# Altium PCB GY-G11.PCBDOC (part 1 of 7)
Units mm, origin at the board's own origin, x right, y up, seen from the top; angles counter-clockwise.
Board outline 170.4 x 114.15 mm, 2 copper layers (Top Layer, Bottom Layer); 364 components, 260 nets, 1285 pads, 753 vias.
Unrouted connection lines stored in the file: 2.
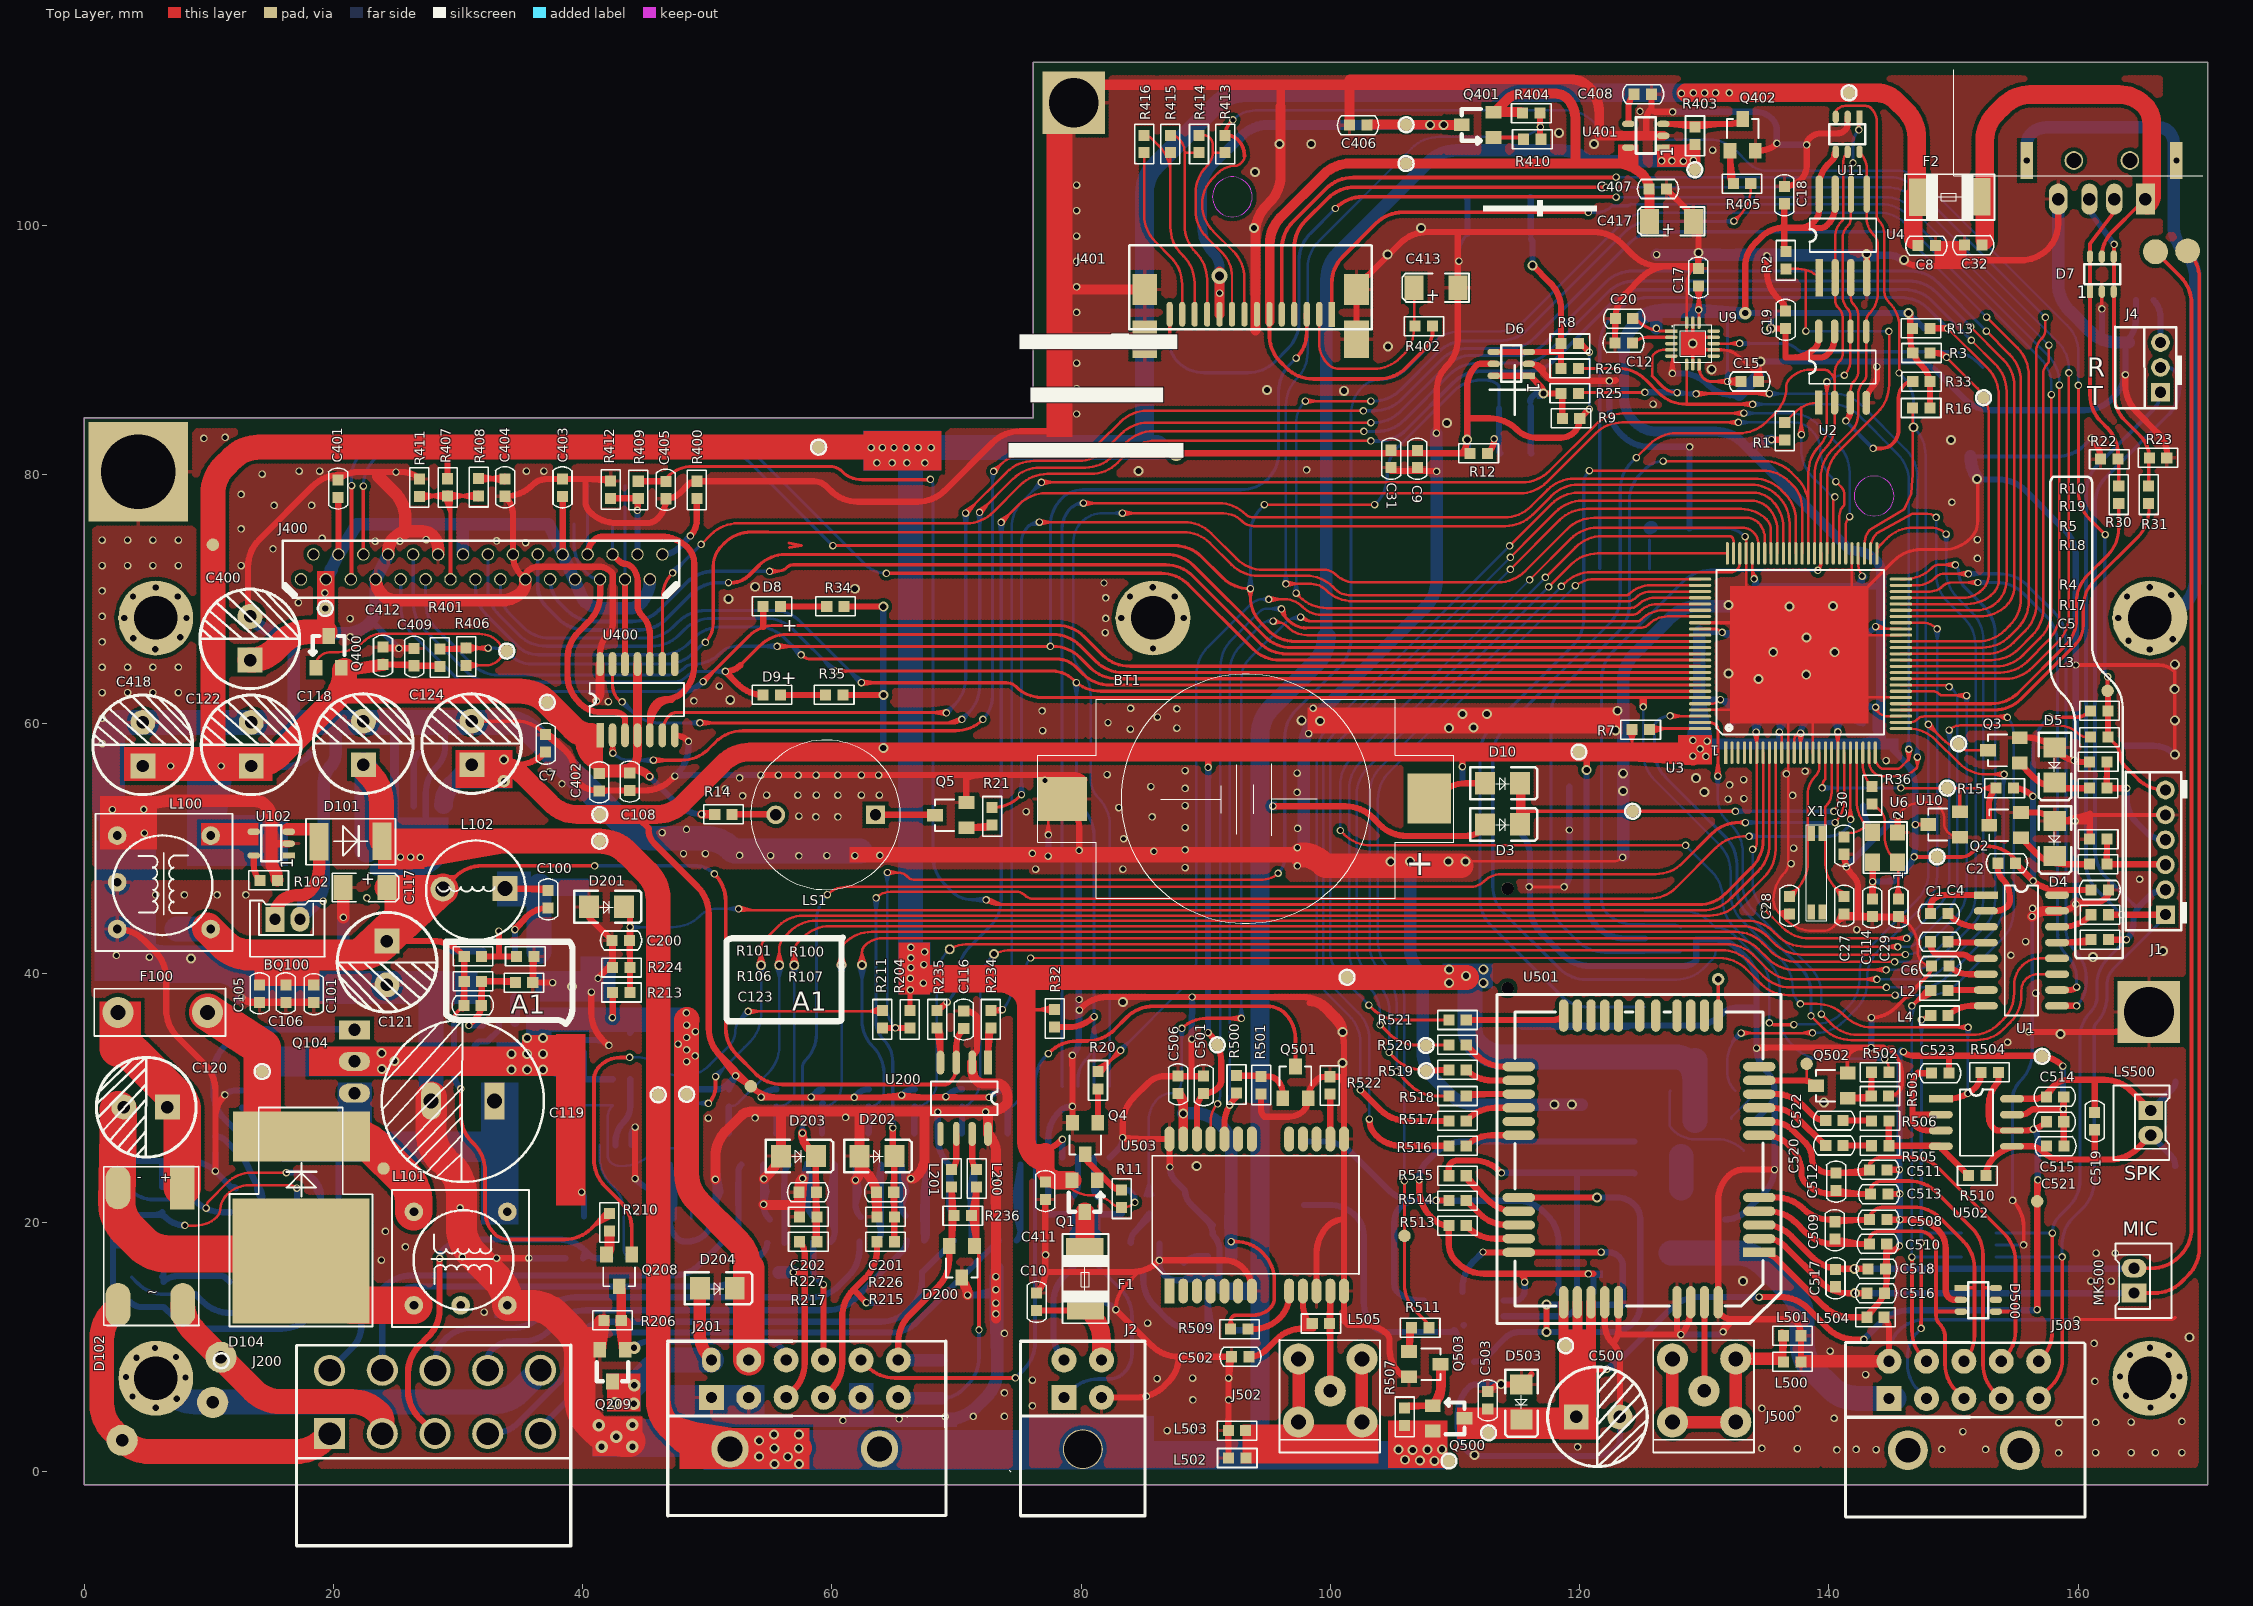
[diagram p0: Top Layer view]
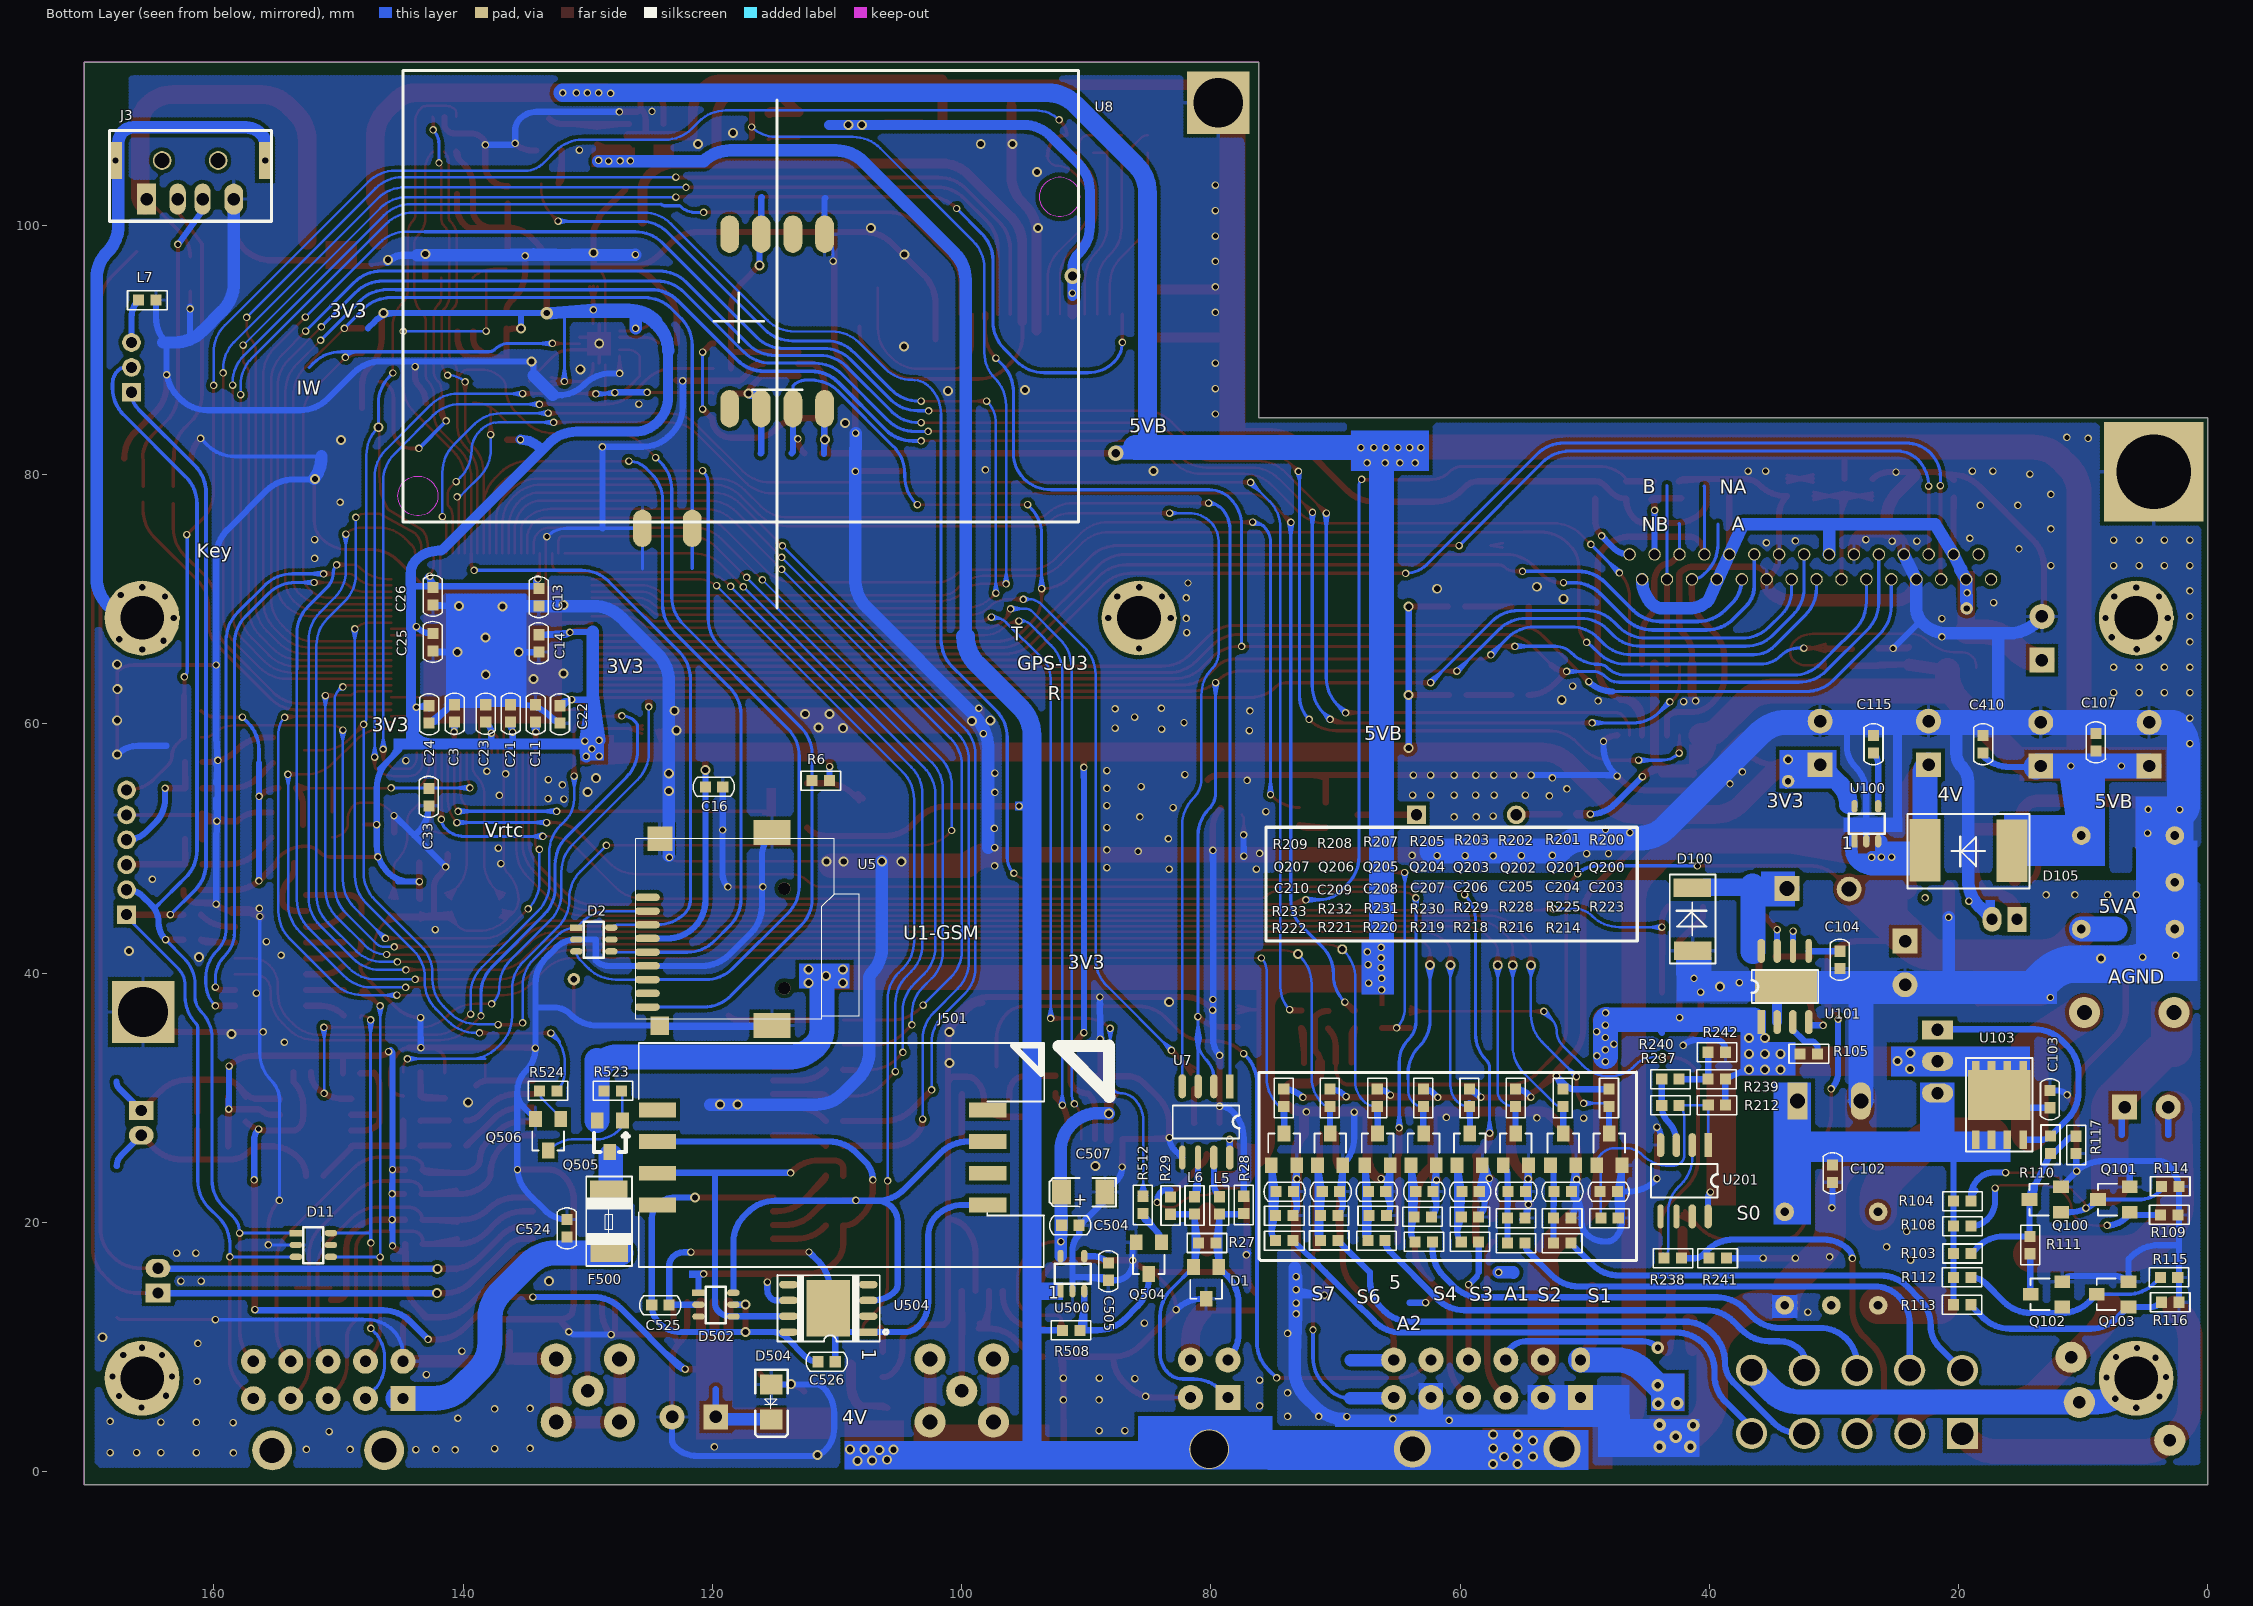
[diagram p1: Bottom Layer view, seen from below]

## Layer stack, top to bottom
Top Layer: signal copper 0.0356
Dielectric: core 0.32, FR-4, Dk 4.8
Bottom Layer: signal copper 0.0356

## Board outline
0,-1.05 170.4,-1.05 170.4,113.1 76.15,113.1 76.15,84.55 0,84.55

## Design rules (kind name [scope] priority, off if disabled: settings)
Clearance [All] p1: gap=0.2
FabricationTestPointUsage TestPointUsage [All] p1: valid=0 allowmultiple=FALSE
FabricationTestpoint Testpoint [All] p1: side=3 testpointundercomponent=TRUE minsize=1.016 maxsize=2.54 preferedsize=1.524 minholesize=0 maxholesize=1.016 preferedholesize=0.813 testpointgrid=0.025 allowsidetop=TRUE allowsidebottom=TRUE usegrid=TRUE gridtolerance=0
PolygonConnect [All] p1: connectstyle=Relief reliefconductorwidth=0.254 reliefentries=4 polygonreliefangle="90 Angle"
RoutingVias [All] p1: holewidth=0.4 width=0.6 viastyle="Through Hole" minholewidth=0.4 minwidth=0.6 maxholewidth=5 maxwidth=3
SilkscreenOverComponentPads [All] p1: minsilkscreentomaskgap=0.254
SolderMaskExpansion [All] p1: expansion=0.102
Width [All] p1: maxlimit=5 minlimit=0.2 preferedwidth=0.5 bottomlayer_prefwidth=0.254 minimp=50.000000 maximp=50.000000 favimp=50.000000
25 further rules are at their usual default settings.

## Classes and differential pairs
component class U_G11_PowerSelfLock: BQ100 C100 C101 C102 C103 C104 C105 C106 C107 C108 C114 C115 C116 C117 C118 C119 C120 C121 C122 C123 C124 D100 D101 D102 D104 D105 F100 L100 L101 L102 Q100 Q101 Q102 Q103 Q104 R100 R101 R102 R103 R104 R105 R106 R107 R108 R109 R110 R111 R112 R113 R114 R115 R116 R117 U100 U101 U102 U103
component class U_G11_Main: BT1 C1 C2 C3 C4 C5 C6 C7 C8 C9 C10 C11 C12 C13 C14 C15 C16 C17 C18 C19 C20 C21 C22 C23 C24 C25 C26 C27 C28 C29 C30 C31 C32 C33 D1 D2 D3 D4 D5 D6 D7 D8 D9 D10 D11 F1 F2 J1 J2 J3 J4 L1 L2 L3 L4 L5 L6 L7 Logo1 LS1 Q1 Q2 Q3 Q4 Q5 R1 R2 R3 R4 R5 R6 R7 R8 R9 R10 R11 R12 R13 R14 R15 R16 R17 R18 R19 R20 R21 R22 R23 R25 R26 R27 R28 R29 R30 R31 R32 R33 R34 R35 R36 U1 U2 U3 U4 U5 U6 U7 U8 U9 U10 U11 X1
component class U_G11_IO_ADC: C200 C201 C202 C203 C204 C205 C206 C207 C208 C209 C210 D200 D201 D202 D203 D204 F200 J200 J201 L200 L201 Q200 Q201 Q202 Q203 Q204 Q205 Q206 Q207 Q208 Q209 R200 R201 R202 R203 R204 R205 R206 R207 R208 R209 R210 R211 R212 R213 R214 R215 R216 R217 R218 R219 R220 R221 R222 R223 R224 R225 R226 R227 R228 R229 R230 R231 R232 R233 R234 R235 R236 R237 R238 R239 R240 R241 R242 U200 U201
component class U_G11_GPS-GSM: C500 C501 C502 C503 C504 C505 C506 C507 C508 C509 C510 C511 C512 C513 C514 C515 C516 C517 C518 C519 C520 C521 C522 C523 C524 C525 C526 D500 D502 D503 D504 F500 J500 J501 J502 J503 L500 L501 L502 L503 L504 L505 LS500 MK500 Q500 Q501 Q502 Q503 Q504 Q505 Q506 R500 R501 R502 R503 R504 R505 R506 R507 R508 R509 R510 R511 R512 R513 R514 R515 R516 R517 R518 R519 R520 R521 R522 R523 R524 U500 U501 U502 U503 U504
component class G11-KeyDispPrint: C400 C401 C402 C403 C404 C405 C406 C407 C408 C409 C410 C411 C412 C413 C417 C418 J400 J401 J402 J403 Q400 Q401 Q402 R400 R401 R402 R403 R404 R405 R406 R407 R408 R409 R410 R411 R412 R413 R414 R415 R416 U400 U401

## Components (designator, comment, footprint, x,y, rotation, side; value= is the part's Value field where it differs from the comment)
BQ100 "3V6" BT-2.0#1 15.3,44.3 r180 top locked
BT1 "3V6" BAT3V-33*20 93.2,54 r180 top locked
C1 "104" C0603#1 148.1,44.8 r0 top locked
C2 "104" C0603#1 155,48.8 r180 top locked
C3 "104" C0603#1 140.7,60.1 r90 bottom locked
C4 "104" C0603#1 149.6,42.5 r180 top locked
C5 "104" C0603#1 161,46.7 r0 top locked
C6 "104" C0603#1 148.2,40.6 r0 top locked
C7 "104" C0603#1 37,57.7 r90 top locked
C8 "104" C0603#1 147.1,98.4 r0 top locked
C9 "104" C0603#1 107,82 r270 top locked
C10 "104" C0603#1 76.4,12.9 r90 top locked
C11 "104" C0603#1 134.2,60.1 r90 bottom locked
C12 "104" C0603#1 122.8,90.6 r0 top locked
C13 "104" C0603#1 133.9,70.9 r270 bottom locked
C14 "104" C0603#1 133.9,67.2 r270 bottom locked
C15 "104" C0603#1 132.9,87.5 r0 top locked
C16 "104" C0603#2 120.6,55 r180 bottom locked
C17 "104" C0603#1 129.5,95.1 r90 top locked
C18 "104" C0603#1 136.4,101.7 r90 top locked
C19 "104" C0603#1 136.5,91.7 r90 top locked
C20 "104" C0603#1 124.3,92.5 r180 top locked
C21 "104" C0603#1 136.2,60.1 r90 bottom locked
C22 "104" C0603#1 132.2,61.5 r270 bottom locked
C23 "104" C0603#1 138.2,60.1 r90 bottom locked
C24 "104" C0603#1 142.7,61.5 r270 bottom locked
C25 "104" C0603#1 142.4,67.3 r270 bottom locked
C26 "104" C0603#1 142.4,71 r270 bottom locked
C27 "15P" C0603#1 141.2,44.7 r90 top locked
C28 "15P" C0603#1 136.8,44.7 r90 top locked
C29 "15P" C0603#1 145.6,46 r270 top locked
C30 "15P" C0603#1 141.2,49.5 r90 top locked
C31 "104" C0603#3 104.9,82 r270 top locked
C32 "104" C0603#3 152.3,98.4 r180 top locked
C33 "104" C0603#2 142.7,54.87 r270 bottom locked
C100 "104" C0603#1 37.2,45.2 r90 top locked
C101 "104" C0603#1 18.4,37.6 r90 top locked
C102 "104" C0603#1 30.089,24.66 r270 bottom locked
C103 "104" C0603#1 12.689,29.16 r90 bottom locked
C104 "104" C0603#1 29.5,41.8 r270 bottom locked
C105 "104" C0603#1 14.1,39.1 r270 top locked
C106 "104" C0603#1 16.2,39.1 r270 top locked
C107 "104" C0603#1 9,57.8 r90 bottom locked
C108 "104" C0603#1 43.8,56.1 r270 top locked
C114 "104" C0603#1 143.5,46 r270 top locked
C115 "104" C0603#1 26.8,59.1 r270 bottom locked
C116 "102" C0603#1 70.6,37 r270 top locked
C117 "22uF/16V" A(3216)#1 24.3,46.9 r180 top locked
C118 "22uF/16V" RB-3.5mm#1 22.4,56.7 r90 top locked
C119 "1000uF/50V" RB.2/.4 32.9,29.8 r0 top locked
C120 "10uF/250V" RB-3.5mm#2 6.689,29.26 r180 top locked
C121 "470uF/10V" RB-3.5mm#1 24.3,42.6 r270 top locked
C122 "470uF/10V" RB-3.5mm#1 13.4,56.6 r90 top locked
C123 "150pF" C0603#1 31.9,37.4 r180 top locked
C124 "470uF/10V" RB-3.5mm#1 31.1,56.7 r90 top locked
C200 "104" C0603#1 43.8,42.6 r180 top locked
C201 "104" C0603#1 65,22.4 r180 top locked
C202 "104" C0603#1 58.8,22.4 r180 top locked
C203 "102" C0603#1 48.8,22.5 r180 bottom locked
C204 "102" C0603#1 52.5,22.5 r180 bottom locked
C205 "102" C0603#1 56.2,22.5 r180 bottom locked
C206 "102" C0603#1 59.9,22.5 r180 bottom locked
C207 "102" C0603#1 63.6,22.5 r180 bottom locked
C208 "102" C0603#1 67.4,22.5 r180 bottom locked
C209 "102" C0603#1 71.1,22.5 r180 bottom locked
C210 "102" C0603#1 74.8,22.5 r180 bottom locked
C400 "470uF/10V" RB-3.5mm#1 13.3,65.1 r90 top locked
C401 "104" C0603#4 20.4,79.6 r270 top locked
C402 "104" C0603#4 41.3,54.6 r90 top locked
C403 "104" C0603#1 38.4,79.7 r270 top locked
C404 "104" C0603#4 33.8,79.7 r270 top locked
C405 "104" C0603#4 46.7,79.5 r270 top locked
C406 "104" C0603#4 101.501,108.07 r0 top locked
C407 "104" C0603#1 127,102.9 r180 top locked
C408 "104" C0603#4 125.8,110.5 r180 top locked
C409 "104" C0603#4 26.5,66.1 r270 top locked
C410 "104" C0603#1 18,59.1 r270 bottom locked
C411 "104" C0603#1 77.1,21.8 r90 top locked
C412 "104" C0603#1 24,66.2 r270 top locked
C413 "4.7uF/10V" A(3216)#2 106.701,94.97 r0 top locked
C417 "10uF/10V" A(3216)#2 125.6,100.3 r0 top locked
C418 "470uF/10V" RB-3.5mm#1 4.7,56.6 r90 top locked
C500 "470uF/10V" RB-3.5mm#1 119.7,4.4 r0 top locked
C501 "104" C0603#1 89.8,30.3 r90 top locked
C502 "104" C0603#1 93.5,9.2 r180 top locked
C503 "104" C0603#1 112.6,5 r90 top locked
C504 "104" C0603#1 92,19.8 r180 bottom locked
C505 "104" C0603#1 88.2,16.8 r270 bottom locked
C506 "104" C0603#1 87.8,31.8 r270 top locked
C507 "10uF/10V" A(3216)#2 92,22.4 r180 bottom locked
C508 "10pF" C0603#1 144.7,20.2 r180 top locked
C509 "10pF" C0603#1 140.5,20.1 r270 top locked
C510 "10pF" C0603#1 143.2,18.3 r0 top locked
C511 "10pF" C0603#1 144.7,24.2 r180 top locked
C512 "10pF" C0603#1 140.6,24 r270 top locked
C513 "10pF" C0603#1 143.3,22.3 r0 top locked
C514 "10pF" C0603#1 157.4,30.1 r0 top locked
C515 "10pF" C0603#1 158.9,26.1 r180 top locked
C516 "10pF" C0603#1 144.5,14.3 r180 top locked
C517 "10pF" C0603#1 140.5,14.8 r90 top locked
C518 "10pF" C0603#1 143.1,16.3 r0 top locked
C519 "33pF" C0603#1 161.3,27.4 r90 top locked
C520 "104" C0603#1 139.7,26.2 r0 top locked
C521 "104" C0603#1 157.4,28.1 r0 top locked
C522 "104" C0603#1 139.7,28.2 r0 top locked
C523 "104" C0603#1 148.2,32 r0 top locked
C524 "104" C0603#5 131.7,18.8 r90 bottom locked
C525 "104" C0603#5 124.9,13.4 r180 bottom locked
C526 "104" C0603#3 110.1,8.8 r0 bottom locked
D1 "PESD" SOT-233#1 79.4,16.4 r0 bottom locked
D2 "SRV05-4" SOT-236#1 130.9,42.7 r270 bottom locked
D3 "CUS15S30" D1206#1 112.4,51.9 r0 top locked
D4 "1N4148" D1206#2 158.1,52.2 r270 top locked
D5 "1N4148" D1206#2 158.1,58.1 r270 top locked
D6 "SRV05-4" SOT-236#1 115.9,88.9 r90 top
D7 "SRV05-4" SOT-236#1 161.9,94.7 r0 top
D8 "LED" R0603#1 55.9,69.4 r180 top locked
D9 "LED" R0603#1 55.9,62.3 r180 top locked
D10 "CUS15S30" D1206#1 112.4,55.2 r0 top locked
D11 "ESD05V26T-5L" SOT-236#2 153.4,18.2 r270 bottom
D100 "1N5822" D2010 41.389,44.46 r270 bottom locked
D101 "1N5822" D2010 21.5,50.6 r180 top locked
D102 "DB153S" DB156S 7.9,23.1 r180 top locked
D104 "SM8S36" DO-218 22.9,11.9 r90 top locked
D105 "1N5408" D-214 19.2,49.8 r0 bottom locked
D200 "PESD" SOT-233#1 71.4,18.1 r180 top locked
D201 "1N4732A/4V7" D1206#2 40.5,45.3 r0 top locked
D202 "1N4732A/4V7" D1206#2 62.2,25.3 r0 top locked
D203 "1N4732A/4V7" D1206#2 55.9,25.3 r0 top locked
D204 "SD103A" D1206#3 49.4,14.7 r0 top locked
D500 "ESD05V26T-5L" SOT-236#2 150.6,13.8 r270 top
D502 "SRV05-4" SOT-236#1 121.1,13.4 r270 bottom locked
D503 "1N4732A/4V7" D1206#2 115.3,7 r270 top locked
D504 "1N4732A/4V7" D1206#1 115.3,7 r270 bottom locked
F1 "N110" F0820#1 80.3,15.6 r270 top locked
F2 "N110" F0820#1 149.8,102.3 r180 top locked
F100 "N210" RAD0.2 2.689,36.86 r0 top locked
F500 "N110" F0820#2 128.3,20.2 r270 bottom locked
J1 "ISP" HDR1X6-2.0 167,44.7 r90 top locked
J2 "J_V" HDR2X2-3MM 78.6,6 r270 top locked
J3 "J_USB" USB-A1 165.4,102.6 r270 bottom locked
J4 "RS232" HDR1X3-2.0 166.6,86.6 r90 top locked
J200 "J_GB19056" HDR5*2-4mm 19.686,3.05 r270 top locked
J201 "J_IO" HDR2X6-3MM 50.3,6 r270 top locked
J400 "628MCL701" FPC-30H 46.4,73.6 r180 top locked
J401 "LCM_KEY" FPC-14-1.0 93.589,93.86 r180 top locked
J500 "J_GSM_ANT" ANT-SMA 130,6.5 r270 top locked
J501 "SIM" SIM3-8P 123.4,21.4 r90 bottom locked
J502 "J_GPS_ANT" ANT-SMA 100,6.5 r270 top locked
J503 "Header 5X2" HDR2X5-3MM 144.8,5.9 r270 top locked
L1 "601" 0603 162.4,44.7 r180 top locked
L2 "601" 0603 148.2,38.6 r0 top locked
L3 "601" 0603 162.4,42.7 r180 top locked
L4 "601" 0603 148.2,36.6 r0 top locked
L5 "601" 0603 79.3,20.7 r90 bottom locked
L6 "601" 0603 81.3,20.7 r90 bottom locked
L7 "601" 0603 166,94 r180 bottom locked
L100 "1.5mH" CMH-5p 6.4,47.3 r0 top locked
L101 "1.5mH" CMH-5p 30.2,17.1 r90 top locked
L102 "33uH" L10uH_H 33.8,46.8 r180 top locked
L200 "601" 0603 71.6,24.2 r270 top locked
L201 "601" 0603 69.6,24.2 r270 top locked
L500 "601" 0603 136.4,8.8 r0 top locked
L501 "601" 0603 136.4,10.9 r0 top locked
L502 "601" 0603 93.186,1.109 r180 top locked
L503 "601" 0603 93.166,3.308 r180 top locked
L504 "10uH" 0603 144.4,12.4 r180 top locked
L505 "27nH" 0603 99.9,11.9 r180 top locked
LS1 "Buzzer" Buzzer 63.5,52.7 r180 top locked
LS500 "SPEAKER" BT-2.0#1 165.8,29 r90 top locked
MK500 "Mic2" BT-2.0#2 164.5,14.322 r270 top locked
Q1 "AO3401A" SOT-233PM#1 81.3,23.4 r180 top locked
Q2 "S9013" SOT-233#2 155.4,50.9 r90 top locked
Q3 "S9013" SOT-233#2 155.3,56.9 r90 top locked
Q4 "S9013" SOT-233#2 81.3,28 r180 top locked
Q5 "S9013" SOT-233#2 70.8,51.7 r90 top locked
Q100 "2N5551" SOT-233#1 11.789,20.86 r90 bottom locked
Q101 "2N5551" SOT-233#1 6.289,20.86 r90 bottom locked
Q102 "2N5551" SOT-233#3 11.689,13.26 r90 bottom locked
Q103 "2N5551" SOT-233#3 6.389,13.26 r90 bottom locked
Q104 "IRFI9640" TO-220-3 21.689,35.46 r270 top locked
Q200 "2N5551" SOT-233#2 49,24.6 r180 bottom locked
Q201 "2N5551" SOT-233#2 52.7,24.6 r180 bottom locked
Q202 "2N5551" SOT-233#2 56.5,24.6 r180 bottom locked
Q203 "2N5551" SOT-233#2 60.2,24.6 r180 bottom locked
Q204 "2N5551" SOT-233#2 63.9,24.6 r180 bottom locked
Q205 "2N5551" SOT-233#2 67.6,24.6 r180 bottom locked
Q206 "2N5551" SOT-233#2 71.4,24.6 r180 bottom locked
Q207 "2N5551" SOT-233#2 75.1,24.6 r180 bottom locked
Q208 "S9012" SOT-233#1 43.9,17.4 r180 top locked
Q209 "AO3400A" SOT-233NM 43.4,9.8 r180 top locked
Q400 "AO3401A" SOT-233PM#1 18.6,64.5 r0 top locked
Q401 "AO3401A" SOT-233PM#1 113.089,107.06 r90 top locked
Q402 "S9013" SOT-233#2 132.1,106 r0 top locked
Q500 "AO3401A" SOT-233PM#1 108.2,5.3 r270 top locked
Q501 "S9013" SOT-233#4 96.2,30 r0 top
Q502 "S9013" SOT-233#2 141.5,30 r90 top locked
Q503 "S9013" SOT-233#2 106.3,9.6 r270 top locked
Q504 "S9013" SOT-233#2 84,18.4 r0 bottom locked
Q505 "AO3401A" SOT-233PM#2 127.2,28.2 r0 bottom locked
Q506 "S9013" SOT-233#2 132.2,28.3 r0 bottom locked
R1 "103" R0603#2 136.5,84.2 r270 top locked
R2 "103" R0603#2 136.5,96.5 r90 top locked
R3 "103" R0603#3 146.7,89.8 r0 top locked
R4 "103" R0603#2 160.9,50.8 r0 top locked
R5 "103" R0603#2 160.9,57 r0 top locked
R6 "103" R0603#2 112,55.5 r180 bottom locked
R7 "103" R0603#2 125.6,59.5 r180 top locked
R8 "103" R0603#2 118.501,90.57 r0 top locked
R9 "103" R0603#2 118.601,84.57 r0 top locked
R10 "103" R0603#2 162.4,61 r180 top locked
R11 "103" R0603#2 83.2,21.2 r90 top locked
R12 "103" R0603#2 112.601,81.67 r180 top locked
R13 "103" R0603#2 148.1,91.7 r180 top locked
R14 "101" R0603#2 52,52.7 r180 top locked
R15 "102" R0603#2 153.4,54.9 r0 top locked
R16 "102" R0603#2 146.7,85.4 r0 top locked
R17 "102" R0603#2 162.3,48.7 r180 top locked
R18 "102" R0603#2 162.3,54.8 r180 top locked
R19 "102" R0603#2 162.4,58.9 r180 top locked
R20 "102" R0603#2 81.3,30.7 r90 top locked
R21 "102" R0603#2 72.904,53.294 r270 top locked
R22 "153" R0603#2 163.2,81.2 r180 top locked
R23 "153" R0603#2 165.7,81.4 r0 top locked
R25 "471" R0603#2 118.501,86.57 r0 top locked
R26 "471" R0603#2 118.501,88.57 r0 top locked
R27 "121" R0603#2 81,18.4 r180 bottom locked
R28 "222" R0603#2 77.4,20.7 r90 bottom locked
R29 "222" R0603#2 83.189,22.06 r270 bottom locked
R30 "18R" R0603#2 163.3,79.1 r270 top locked
R31 "18R" R0603#2 165.7,79.1 r270 top locked
R32 "103" R0603#3 77.9,37.1 r270 top locked
R33 "103" R0603#3 146.7,87.5 r0 top locked
R34 "103" R0603#1 61,69.4 r180 top locked
R35 "103" R0603#1 60.9,62.3 r180 top locked
R36 "000/NC" R0603#4 143.5,55 r270 top locked
R100 "5362" R0603#2 36.1,41.3 r180 top locked
R101 "304" R0603#2 31.9,41.3 r180 top locked
R102 "203" R0603#2 14.1,47.5 r0 top locked
R103 "104" R0603#2 18.989,17.46 r0 bottom locked
R104 "104" R0603#2 18.989,21.66 r0 bottom locked
R105 "104" R0603#1 31.3,33.5 r0 bottom locked
R106 "304" R0603#2 31.9,39.3 r180 top locked
R107 "5762" R0603#2 36,39.2 r180 top locked
R108 "104" R0603#2 18.989,19.66 r0 bottom locked
R109 "3321" R0603#2 2.389,20.56 r0 bottom locked
R110 "102" R0603#3 12.589,26.96 r270 bottom locked
R111 "104" R0603#3 14.289,17.46 r90 bottom locked
R112 "104" R0603#3 18.989,15.56 r0 bottom locked
R113 "104" R0603#3 18.989,13.36 r0 bottom locked
R114 "5602" R0603#3 2.289,22.86 r0 bottom locked
R115 "2702" R0603#3 2.389,15.56 r0 bottom locked
R116 "1821" R0603#3 2.289,13.56 r0 bottom locked
R117 "0/NC" R0603#4 10.6,25.5 r90 bottom locked
R200 "103" R0603#2 48,30.7 r270 bottom locked
R201 "103" R0603#2 51.7,30.7 r270 bottom locked
R202 "103" R0603#2 55.5,30.7 r270 bottom locked
R203 "103" R0603#2 59.2,30.7 r270 bottom locked
R204 "103" R0603#2 66.3,37 r270 top locked
R205 "103" R0603#2 62.9,30.7 r270 bottom locked
R206 "103" R0603#2 43.1,12.1 r180 top locked
R207 "103" R0603#2 66.6,30.7 r270 bottom locked
R208 "103" R0603#2 70.4,30.7 r270 bottom locked
R209 "103" R0603#2 74.1,30.7 r270 bottom locked
R210 "102" R0603#2 42.1,19.3 r90 top locked
R211 "102" R0603#2 64,35.6 r90 top locked
R212 "154" R0603#2 40.089,29.46 r180 bottom locked
R213 "154" R0603#2 42.4,38.5 r0 top locked
R214 "154" R0603#2 51.1,18.3 r0 bottom locked
R215 "154" R0603#2 63.6,18.5 r0 top locked
R216 "154" R0603#2 54.8,18.3 r0 bottom locked
R217 "154" R0603#2 57.4,18.5 r0 top locked
R218 "154" R0603#2 58.5,18.4 r0 bottom locked
R219 "154" R0603#2 62.2,18.4 r0 bottom locked
R220 "154" R0603#2 66,18.5 r0 bottom locked
R221 "154" R0603#2 71.2,18.6 r180 bottom locked
R222 "154" R0603#2 73.4,18.5 r0 bottom locked
R223 "203" R0603#2 47.3,20.3 r0 bottom locked
R224 "203" R0603#2 42.4,40.5 r0 top locked
R225 "203" R0603#2 51.1,20.3 r0 bottom locked
R226 "203" R0603#2 63.6,20.5 r0 top locked
R227 "203" R0603#2 57.4,20.5 r0 top locked
R228 "203" R0603#2 54.8,20.3 r0 bottom locked
R229 "203" R0603#2 58.5,20.4 r0 bottom locked
R230 "203" R0603#2 62.3,20.4 r0 bottom locked
R231 "203" R0603#2 65.9,20.5 r0 bottom locked
R232 "203" R0603#2 69.8,20.5 r0 bottom locked
R233 "203" R0603#2 73.4,20.5 r0 bottom locked
R234 "000" R0603#2 72.7,35.6 r90 top locked
R235 "000" R0603#2 68.4,35.6 r90 top locked
R236 "121" R0603#2 71.2,20.5 r180 top locked
R237 "104" R0603#5 42.389,29.36 r0 bottom locked
R238 "104" R0603#5 42.2,17.1 r0 bottom locked
R239 "513" R0603#5 38.689,31.46 r0 bottom locked
R240 "513" R0603#5 42.389,31.46 r0 bottom locked
R241 "513" R0603#5 38.6,17.1 r0 bottom locked
R242 "513" R0603#2 40.1,33.7 r180 bottom locked
R400 "221" R0603#6 49.2,79.5 r270 top locked
R401 "103" R0603#6 28.5,64.6 r90 top locked
R402 "103" R0603#2 108.201,91.87 r180 top locked
R403 "103" R0603#2 129.3,107.9 r270 top locked
R404 "103" R0603#6 115.389,109.06 r0 top locked
R405 "103" R0603#6 132.3,103.4 r0 top locked
R406 "101" R0603#2 30.6,64.7 r90 top locked
R407 "393" R0603#6 29.2,79.7 r270 top locked
R408 "102" R0603#2 31.7,79.7 r270 top locked
R409 "102" R0603#6 44.5,79.5 r270 top locked
R410 "101" R0603#2 115.489,106.96 r0 top locked
R411 "Res Adj2" 0603 26.9,78.3 r90 top locked
R412 "153" R0603#2 42.2,78.1 r90 top locked
R413 "103" R0603#3 91.589,107.26 r270 top locked
R414 "103" R0603#3 89.489,107.26 r270 top locked
R415 "103" R0603#3 87.189,107.26 r270 top locked
R416 "103" R0603#3 85.089,107.26 r270 top locked
R500 "103" R0603#4 92.5,31.8 r270 top
R501 "103" R0603#4 94.4,30.3 r90 top
R502 "103" R0603#2 143.4,32.1 r0 top locked
R503 "103" R0603#2 144.8,30.1 r180 top locked
R504 "103" R0603#2 153.6,32 r180 top locked
R505 "103" R0603#2 143.4,26.2 r0 top locked
R506 "103/NC" R0603#2 143.4,28.2 r0 top locked
R507 "103" R0603#2 105.9,3.7 r90 top locked
R508 "103" R0603#2 90.5,11.3 r0 bottom locked
R509 "103" R0603#2 93.4,11.4 r180 top locked
R510 "393" R0603#2 151.2,23.8 r0 top locked
R511 "102" R0603#2 106.5,11.6 r0 top locked
R512 "102" R0603#2 85.5,20.7 r90 bottom locked
R513 "18R" R0603#2 110.9,19.7 r180 top locked
R514 "18R" R0603#2 110.9,21.7 r180 top locked
R515 "18R" R0603#2 110.9,23.7 r180 top locked
R516 "471" R0603#2 110.9,26.1 r180 top locked
R517 "471" R0603#2 110.9,28.1 r180 top locked
R518 "471" R0603#2 110.9,30.1 r180 top locked
R519 "471" R0603#2 110.9,32.2 r180 top locked
R520 "471" R0603#2 110.9,34.2 r180 top locked
R521 "471" R0603#2 110.9,36.2 r180 top locked
R522 "0R" R0603#2 100,31.7 r270 top locked
R523 "103" R0603#3 128.7,30.6 r180 bottom locked
R524 "102" R0603#3 133.9,30.6 r180 bottom locked
U1 "SP232EEN" SO-G16/G6.9 152.6,46.3 r270 top locked
U2 "MB85RS64A" SMD8A 139.2,85.7 r90 top locked
U3 "LPC1765FBD100" LQFP100 131.7,58 r90 top locked
U4 "MX25L6406EM2I" SOIC8-208mil 139.2,95.8 r90 top locked
U5 "TF_Card" TF_CARD 114.2,38.8 r90 bottom locked
U6 "12MHz" XTAL3.2*2.5 144.5,50.1 r90 top locked
U7 "SP485E" SMD8A 78.5,31 r270 bottom locked
U8 "IC Card" IC_CARD-S1 114.8,86.8 r0 bottom locked
U9 "KXTIK-1004" LGA-3*3*0.9 128.6,89.3 r0 top locked
U10 "CAT803RTBI" SOT-233#3 150.489,50.96 r90 top locked
U11 "GT20L16P1Y" SOT-236#3 141.5,108.7 r180 top locked
U100 "SP6219EM5-3.3V" SOT-235 27.4,50.6 r180 bottom locked
U101 "MP24943DN" SOP8-Hot 35.8,36 r90 bottom locked
U102 "SE9017" SOT-235 16.4,50.4 r90 top locked
U103 "IRF6216" SOP8-Power 18.589,26.56 r90 bottom locked
U200 "TJA1051T" SMD8A 72.5,32.9 r270 top locked
U201 "LM293D" SMD8A 40.12,26.278 r270 bottom locked
U400 "LB1836M" SO-G14-1.0mm 44.4,64.8 r0 top locked
U401 "SP6219EM5-3.3V" SOT-235 126.7,107.2 r90 top locked
U500 "SP6219EM5-3.3V" SOT-235 91.1,14.5 r180 bottom locked
U501 "M35" M35 130,13.6 r180 top locked
U502 "LM4871" SMD8A 148.9,29.9 r0 top locked
U503 "NEO-5Q" NEO-5Q 100,14.5 r90 top locked
U504 "SIM_Card" QFN5*6-8 107.7,11.2 r0 bottom locked
X1 "32.768K" 32K768 138.6,51.2 r0 top locked

## Footprints (in the part's own frame and the unit in brackets; to place one, negate y for a bottom-side part, rotate by r counter-clockwise, add the part's x,y. Pads: shape width x height; smd on the part's side, far side on the other; paste and mask are expansions set on the pad)
32K768 [mm]
  rect 0.6x1.2 smd: 1(-0.004,-0.007) 2(0.846,-0.003) 3(-0.004,-6.307) 4(0.846,-6.303)
  silkscreen extent -0.41,-7 1.24,0.71
0603 [mil]
  rect 35x35 smd: 1(-1.34,0.32) 2(53.66,0.32)
  silkscreen extent -36,-30 89,30
A(3216)#1 [mm]
  rect 1.524x2 smd: 1(0.014,0.022) 2(3.514,0.022)
  silkscreen extent -0.94,-1.12 4.4,1.16
A(3216)#2 [mm]
  rect 1.524x2 smd: 1(0.018,0.033) 2(3.518,0.033)
  silkscreen extent -0.94,-1.11 4.4,1.18
ANT-SMA [mm]
  round 2.5 hole 1.1: 1(0.012,-0.013)
  round 2.5 hole 1.2: 2(-2.558,2.522) 2(-2.558,-2.558) 2(2.522,2.522) 2(2.522,-2.558)
  silkscreen extent -4.07,-4.1 4.95,3.98
BAT3V-33*20 [mm]
  rect 3.5x4 smd: 1(-14.728,-0.021)
  rect 4x3.5 smd: 2(14.728,0.021)
  silkscreen extent -16.68,-10 16.68,10
BT-2.0#1 [mm]
  rect 1.5x2 hole 0.9: 1(-0.011,-0.021)
  oval 1.5x2 hole 0.9: 2(-2.011,-0.021)
  silkscreen extent -4.01,-1.52 2.01,2.98
BT-2.0#2 [mm]
  rect 1.5x2 hole 0.9: 1(-0.012,-0.02)
  oval 1.5x2 hole 0.9: 2(-2.012,-0.02)
  silkscreen extent -4.01,-1.52 2.01,2.98
Buzzer [mm]
  rect 1.5x1.5 hole 0.9: 1(0.011,-0.009)
  round 1.5 hole 0.9: 2(8.011,-0.009)
  silkscreen extent -1.99,-6.01 10.01,5.99
C0603#1 [mil]
  rect 35x35 smd: 1(1.64,-0.88) 2(56.64,-0.88)
  silkscreen extent -37,-31 93,29
C0603#2 [mil]
  rect 35x35 smd: 1(1.7,-1.78) 2(56.7,-1.78)
  silkscreen extent -37,-32 93,28
C0603#3 [mil]
  rect 35x35 smd: 1(1.4,-1.01) 2(56.4,-1.01)
  silkscreen extent -37,-31 93,29
C0603#4 [mil]
  rect 35x35 smd: 1(1.29,-1.04) 2(56.29,-1.04)
  silkscreen extent -37,-32 93,29
C0603#5 [mil]
  rect 35x35 smd: 1(1.68,-1.36) 2(56.68,-1.36)
  silkscreen extent -37,-32 93,29
CMH-5p [mm]
  round 1.5 hole 0.7: 1(3.748,-3.756) 2(-3.752,-3.756) 3(3.748,3.744) 4(-3.752,3.744) 5(-3.752,-0.006)
  silkscreen extent -5.5,-5.51 5.5,5.49
D1206#1 [mm]
  rect 1.6x1.8 smd: 1(-0.001,0.033) 2(2.804,0.043)
  silkscreen extent -1.2,-1.26 4.2,1.34
D1206#2 [mm]
  rect 1.6x1.8 smd: 1(0,0.022) 2(2.805,0.032)
  silkscreen extent -1.19,-1.27 4.21,1.33
D1206#3 [mm]
  rect 1.6x1.8 smd: 1(-0.004,0.011) 2(2.801,0.021)
  silkscreen extent -1.2,-1.28 4.2,1.32
D2010 [mil]
  rect 59x118 smd: 1(104.43,2.59) 2(-94.57,0.59)
  silkscreen extent -137,-70 145,75
D-214 [mm]
  rect 2.5x5 smd: 1(-3.494,-0.024) 2(3.506,-0.074)
  silkscreen extent -4.91,-2.98 4.91,2.99
DB156S [mm]
  rect 2x3.5 smd: 1(0.032,0.298)
  oval 2x3.5 smd: 2(5.192,0.298) 3(5.192,9.698) 4(-0.008,9.698)
  silkscreen extent -1.32,-1.37 6.33,11.37
DO-218 [mm]
  rect 10x11 smd: 1(5.003,5.492)
  rect 4x11 smd: 2(15.002,5.472)
  silkscreen extent -0.26,-0.24 17.33,11.24
F0820#1 [mil]
  rect 59x118 smd: 1(104.14,1.92) 2(-94.86,-0.07)
  silkscreen extent -137,-71 145,74
F0820#2 [mil]
  rect 59x118 smd: 1(103.98,1.45) 2(-95.02,-0.55)
  silkscreen extent -137,-72 145,74
FPC-14-1.0 [mm]
  rect 2x2.5 smd: 0(-8.512,-1.01) 0(8.488,-1.01)
  rect 0.5x2 smd: 1(-6.512,0.99)
  oval 0.5x2 smd: 2(-5.512,0.99) 3(-4.512,0.99) 4(-3.512,0.99) 5(-2.512,0.99) 6(-1.512,0.99) 7(-0.512,0.99) 8(0.488,0.99) 9(1.488,0.99) 10(2.488,0.99) 11(3.488,0.99) 12(4.488,0.99) 13(5.488,0.99) 14(6.488,0.99)
  silkscreen extent -9.72,-4.56 9.73,2.18
FPC-30H [mm]
  round 1 hole 0.8: 1(0.006,-0.009) 2(1.006,1.991) 3(2.006,-0.009) 4(3.006,1.991) 5(4.006,-0.009) 6(5.006,1.991) 7(6.006,-0.009) 8(7.006,1.991) 9(8.006,-0.009) 10(9.006,1.991) 11(10.006,-0.009) 12(11.006,1.991) 13(12.006,-0.009) 14(13.006,1.991) 15(14.006,-0.009) 16(15.006,1.991) 17(16.006,-0.009) 18(17.006,1.991) 19(18.006,-0.009) 20(19.006,1.991) 21(20.006,-0.009) 22(21.006,1.991) 23(22.006,-0.009) 24(23.006,1.991) 25(24.006,-0.009) 26(25.006,1.991) 27(26.006,-0.009) 28(27.006,1.991) 29(28.006,-0.009) 30(29.006,1.991)
  silkscreen extent -1.34,-1.1 30.48,3.46
HDR1X3-2.0 [mm]
  rect 1.5x1.5 hole 0.9: 1(0.007,-0.004)
  round 1.5 hole 0.9: 2(2.007,-0.004) 3(4.007,-0.004)
  silkscreen extent -1.26,-1.27 5.24,1.29
HDR1X6-2.0 [mm]
  rect 1.5x1.5 hole 0.9: 1(0,0)
  round 1.5 hole 0.9: 2(2,0) 3(4,0) 4(6,0) 5(8,0) 6(10,0)
  silkscreen extent -1.27,-1.27 11.43,1.27
HDR2X2-3MM [mm]
  round 3.2 hole 3: 0(4.19,1.53)
  rect 2x2 hole 0.9: 1(0.036,0.027)
  round 2 hole 0.9: 2(-2.964,0.027) 3(0.036,3.027) 4(-2.964,3.027)
  silkscreen extent -4.47,-3.47 9.54,6.53
HDR2X5-3MM [mm]
  round 3.2 hole 2: 0(4.18,1.53) 0(4.19,10.52)
  rect 2x2 hole 0.9: 1(0.036,0.027)
  round 2 hole 0.9: 2(-2.964,0.027) 3(0.036,3.027) 4(-2.964,3.027) 5(0.036,6.027) 6(-2.964,6.027) 7(0.036,9.027) 8(-2.964,9.027) 9(0.036,12.027) 10(-2.964,12.027)
  silkscreen extent -4.47,-3.47 9.54,15.76
HDR2X6-3MM [mm]
  round 3 hole 2: 0(4.18,13.52) 0(4.18,1.52)
  rect 2x2 hole 0.9: 1(0.036,0.027)
  oval 2x1.5 hole 0.9: 2(-2.964,0.027)
  round 2 hole 0.9: 3(0.036,3.027) 4(-2.964,3.027) 5(0.036,6.027) 6(-2.964,6.027) 7(0.036,9.027) 8(-2.964,9.027) 9(0.036,12.027) 10(-2.964,12.027) 11(0.036,15.027) 12(-2.964,15.027)
  silkscreen extent -4.48,-3.47 9.54,18.84
HDR5*2-4mm [mm]
  rect 2.5x2.5 hole 1.8: 1(-0.012,0.002)
  round 2.5 hole 1.8: 2(-5.082,0.002) 3(-0.008,4.232) 4(-5.088,4.237) 5(-0.003,8.462) 6(-5.083,8.467) 7(-0.012,12.692) 8(-5.078,12.697) 9(-0.022,16.922) 10(-5.088,16.927)
  silkscreen extent -7.11,-2.65 8.99,19.35
IC_CARD-S1 [mm]
  oval 1.5x3 smd: 1(-3.81,1.502) 2(-1.27,1.502) 3(1.27,1.502) 4(3.81,1.502) 5(3.81,-12.498) 6(1.27,-12.498) 7(-1.27,-12.498) 8(-3.81,-12.498) 9(6.81,11.102) 10(10.81,11.102)
  Keep-Out Layer circle w0.1: c28.824,8.502 r1.6
  Keep-Out Layer circle w0.1: c-22.675,-15.498 r1.6
  silkscreen extent -24.2,-25.64 30.01,10.6
L10uH_H [mm]
  rect 2x2 hole 1.2: 1(0.032,0.018)
  round 2 hole 1.2: 2(5.022,0.058)
  silkscreen extent -1.63,-3.85 6.37,4.15
LGA-3*3*0.9 [mm]
  rect 1x0.28 smd: 1(-1.245,2.217)
  oval 1x0.28 smd: 2(-1.245,1.717) 3(-1.245,1.218) 4(-1.245,0.717) 5(-1.245,0.218) 9(2.15,0.218) 10(2.15,0.718) 11(2.15,1.218) 12(2.15,1.718) 13(2.15,2.218)
  oval 0.28x1 smd: 6(-0.023,-0.458) 7(0.477,-0.458) 8(0.977,-0.458) 14(0.977,2.9) 15(0.477,2.9) 16(-0.023,2.9)
  silkscreen extent -1.23,-0.28 1.98,2.72
LQFP100 [mm]
  rect 1.8x0.25 smd: 1(-0.306,-0.016)
  oval 1.8x0.25 smd: 2(-0.306,-0.516) 3(-0.306,-1.016) 4(-0.306,-1.516) 5(-0.306,-2.016) 6(-0.306,-2.516) 7(-0.306,-3.016) 8(-0.306,-3.516) 9(-0.306,-4.016) 10(-0.306,-4.516) 11(-0.306,-5.016) 12(-0.306,-5.516) 13(-0.306,-6.016) 14(-0.306,-6.516) 15(-0.306,-7.016) 16(-0.306,-7.516) 17(-0.306,-8.016) 18(-0.306,-8.516) 19(-0.306,-9.016) 20(-0.306,-9.516) 21(-0.306,-10.016) 22(-0.306,-10.516) 23(-0.306,-11.016) 24(-0.306,-11.516) 25(-0.306,-12.016) 51(15.684,-12.146) 52(15.684,-11.646) 53(15.684,-11.146) 54(15.684,-10.646) 55(15.684,-10.146) 56(15.684,-9.646) 57(15.684,-9.146) 58(15.684,-8.646) 59(15.684,-8.146) 60(15.684,-7.646) 61(15.684,-7.146) 62(15.684,-6.646) 63(15.684,-6.146) 64(15.684,-5.646) 65(15.684,-5.146) 66(15.684,-4.646) 67(15.684,-4.146) 68(15.683,-3.646) 69(15.684,-3.146) 70(15.684,-2.646) 71(15.684,-2.146) 72(15.684,-1.646) 73(15.684,-1.146) 74(15.684,-0.646) 75(15.684,-0.146)
  oval 0.25x1.8 smd: 26(1.624,-14.076) 27(2.124,-14.076) 28(2.624,-14.076) 29(3.124,-14.076) 30(3.624,-14.076) 31(4.124,-14.076) 32(4.624,-14.076) 33(5.124,-14.076) 34(5.624,-14.076) 35(6.124,-14.076) 36(6.624,-14.076) 37(7.124,-14.076) 38(7.624,-14.076) 39(8.124,-14.076) 40(8.624,-14.076) 41(9.124,-14.076) 42(9.624,-14.076) 43(10.124,-14.076) 44(10.624,-14.076) 45(11.124,-14.076) 46(11.624,-14.076) 47(12.124,-14.076) 48(12.624,-14.076) 49(13.124,-14.076) 50(13.624,-14.076) 76(13.624,2.044) 77(13.124,2.044) 78(12.624,2.044) 79(12.124,2.044) 80(11.624,2.044) 81(11.124,2.044) 82(10.624,2.044) 83(10.124,2.044) 84(9.624,2.044) 85(9.124,2.044) 86(8.624,2.044) 87(8.124,2.044) 88(7.624,2.044) 89(7.124,2.044) 90(6.624,2.044) 91(6.124,2.044) 92(5.624,2.044) 93(5.124,2.044) 94(4.624,2.044) 95(4.124,2.044) 96(3.624,2.044) 97(3.124,2.044) 98(2.624,2.044) 99(2.124,2.044) 100(1.624,2.044)
  silkscreen extent 1.14,-12.72 14.34,0.72
M35 [mm]
  rect 2.6x0.75 smd: 1(-4.41,-3.998)
  oval 2.6x0.75 smd: 2(-4.41,-5.098) 3(-4.41,-6.198) 4(-4.41,-7.298) 5(-4.41,-8.398) 6(-4.41,-13.398) 7(-4.41,-14.498) 8(-4.41,-15.598) 9(-4.41,-16.698) 10(-4.41,-17.798) 11(-4.41,-18.898) 21(14.89,-18.898) 22(14.89,-17.798) 23(14.89,-16.698) 24(14.89,-15.598) 25(14.89,-14.498) 26(14.89,-13.398) 27(14.89,-8.398) 28(14.89,-7.298) 29(14.89,-6.198) 30(14.89,-5.098) 31(14.89,-3.998)
  oval 0.75x2.6 smd: 12(-1.11,-22.998) 13(-0.01,-22.998) 14(1.09,-22.998) 15(2.19,-22.998) 16(6.89,-22.998) 17(7.99,-22.998) 18(9.09,-22.998) 19(10.19,-22.998) 20(11.29,-22.998) 32(11.29,0.002) 33(10.19,0.002) 34(9.09,0.002) 35(7.99,0.002) 36(6.89,0.002) 37(2.19,0.002) 38(1.09,0.002) 39(-0.01,0.002) 40(-1.11,0.002) 41(3.89,-22.998) 42(5.19,-22.998)
  silkscreen extent -6.16,-24.7 16.64,1.7
NEO-5Q [mm]
  rect 2x0.8 smd: 1(-0.006,12.91)
  oval 2x0.8 smd: 2(-0.006,11.81) 3(-0.006,10.71) 4(-0.006,9.61) 5(-0.006,8.51) 6(-0.006,7.41) 7(-0.006,6.31) 8(-0.006,3.31) 9(-0.006,2.21) 10(-0.006,1.11) 11(-0.006,0.01) 12(-0.006,-1.09) 13(12.194,-1.09) 14(12.194,0.01) 15(12.194,1.11) 16(12.194,2.21) 17(12.194,3.31) 18(12.194,6.31) 19(12.194,7.41) 20(12.194,8.51) 21(12.194,9.61) 22(12.194,10.71) 23(12.194,11.81) 24(12.194,12.91)
  silkscreen extent 1.35,-2.28 10.85,14.3
QFN5*6-8 [mm]
  rect 3.5x4.5 smd: 0(3.011,-1.916)
  rect 1.5x0.6 smd: 1(-0.209,-0.006)
  oval 1.5x0.6 smd: 2(-0.209,-1.276) 3(-0.209,-2.546) 4(-0.209,-3.816) 5(6.191,-3.816) 6(6.191,-2.546) 7(6.191,-1.276) 8(6.191,-0.006)
  silkscreen extent -1.79,-4.58 7.06,0.77
R0603#1 [mil]
  rect 35x35 smd: 1(0.75,-1.17) 2(55.75,-1.17)
  silkscreen extent -34,-31 91,29
R0603#2 [mil]
  rect 35x35 smd: 1(0.23,-1.81) 2(55.23,-1.81)
  silkscreen extent -35,-32 90,28
R0603#3 [mil]
  rect 35x35 smd: 1(1.04,-1.43) 2(56.04,-1.43)
  silkscreen extent -34,-31 91,29
R0603#4 [mil]
  rect 35x35 smd: 1(0.86,-1.42) 2(55.86,-1.42)
  silkscreen extent -34,-31 91,29
R0603#5 [mil]
  rect 35x35 smd: 1(1.09,-1.39) 2(56.09,-1.39)
  silkscreen extent -34,-31 91,29
R0603#6 [mil]
  rect 35x35 smd: 1(1.02,-1.64) 2(56.02,-1.64)
  silkscreen extent -34,-32 91,28
RAD0.2 [mm]
  round 2.5 hole 1.2: 1(0.021,-0.008) 2(7.217,-0.008)
  silkscreen extent -1.88,-1.91 8.64,1.92
RB-3.5mm#1 [mm]
  rect 2x2 hole 1: 1(0.026,-0.008)
  round 2 hole 1: 2(3.526,-0.008)
  silkscreen extent -2.27,-4 5.72,4
RB-3.5mm#2 [mm]
  rect 2x2 hole 1: 1(0.014,0.001)
  round 2 hole 1: 2(3.514,0.001)
  silkscreen extent -2.29,-3.99 5.71,4.01
RB.2/.4 [mm]
  rect 1.6x3 hole 1.2: 1(0.02,-0.05)
  oval 1.6x3 hole 1.2: 2(-5.06,-0.05)
  silkscreen extent -9.04,-6.56 3.98,6.45
SIM3-8P [mm]
  rect 1.2x3 smd: 1(0.009,-25.5) 2(2.549,-25.5) 3(5.089,-25.5) 4(7.629,-25.5) 5(7.629,1) 6(5.089,1) 7(2.549,1) 8(0.009,1)
  silkscreen extent -4.99,-30.04 13.01,2.5
SMD8A [mil]
  rect 76x24 smd: 1(3.03,0.75)
  oval 76x24 smd: 2(3.03,-49.25) 3(3.03,-99.25) 4(2.82,-149.27) 7(228.03,-49.25) 8(228.03,0.75)
  oval 76x19.68 smd: 5(228.03,-149.24) 6(228.03,-99.25)
  silkscreen extent 63,-179 168,31
SO-G14-1.0mm [mil]
  rect 24x76 smd: 1(-118.33,-224.69)
  oval 24x76 smd: 2(-78.96,-224.69) 3(-39.59,-224.69) 4(-0.22,-224.69) 5(39.15,-224.69) 6(78.52,-224.69) 7(117.89,-224.69) 8(117.89,0.31) 9(78.52,0.31) 10(39.15,0.31) 11(-0.22,0.31) 12(-39.59,0.31) 13(-78.96,0.31) 14(-118.33,0.31)
  silkscreen extent -151,-165 147,-60
SO-G16/G6.9 [mil]
  rect 24x76 smd: 1(1.21,-0.61)
  oval 24x76 smd: 2(51.21,-0.61) 3(101.21,-0.61) 4(151.21,-0.61) 5(201.21,-0.61) 6(251.21,-0.61) 7(301.2,-0.61) 8(351.21,-0.61) 9(351.21,224.39) 10(301.21,224.39) 11(251.21,224.39) 12(201.21,224.39) 13(151.2,224.39) 14(101.21,224.39) 15(51.21,224.39) 16(1.2,224.39)
  silkscreen extent -29,59 382,164
SOIC8-208mil [mm]
  rect 3x0.61 smd: 1(0.014,-0.012)
  oval 3x0.61 smd: 2(0.014,-1.292) 3(0.014,-2.562) 4(0.014,-3.832) 7(6.714,-1.292) 8(6.714,-0.012)
  oval 3x0.5 smd: 5(6.714,-3.832) 6(6.714,-2.562)
  silkscreen extent 2.08,-4.59 4.74,0.74
SOP8-Hot [mil]
  rect 98.43x196.85 smd: 0(114.97,-76.67)
  rect 76x24 smd: 1(3.08,1.28)
  oval 76x24 smd: 2(3.08,-48.72) 3(3.08,-98.72) 4(2.87,-148.74) 7(228.08,-48.72) 8(228.08,1.28)
  oval 76x19.68 smd: 5(228.08,-148.72) 6(228.08,-98.72)
  silkscreen extent 63,-179 168,31
SOP8-Power [mm]
  round 1 on Bottom Overlay: 0(-1.54,0.03)
  rect 1.5x0.61 smd: 1(0.076,0.039) 2(0.076,-1.231) 3(0.076,-2.501) 4(0.071,-3.771)
  rect 1.2x0.61 smd: 5(5.791,-3.771) 6(5.791,-2.501) 7(5.791,-1.231) 8(5.791,0.039)
  rect 4x5 smd: 8(3.66,-1.86)
  silkscreen extent -0.86,-4.51 6.64,0.82
SOT-233#1 [mil]
  rect 40x50 smd: 1(-1.51,-0.82) 2(78.49,-0.82) 3(38.49,99.18)
  silkscreen extent -12,39 88,99
SOT-233#2 [mil]
  rect 40x50 smd: 1(-1.54,-0.28) 2(78.46,-0.28) 3(38.46,99.72)
  silkscreen extent -12,40 88,100
SOT-233#3 [mil]
  rect 40x50 smd: 1(-1.77,-0.57) 2(78.23,-0.57) 3(38.23,99.43)
  silkscreen extent -12,39 88,99
SOT-233#4 [mil]
  rect 40x50 smd: 1(-1.01,-1.23) 2(78.99,-1.23) 3(38.99,98.77)
  silkscreen extent -11,39 89,99
SOT-233NM [mil]
  rect 40x50 smd: 1(-0.28,0.44) 2(79.72,0.44) 3(39.72,100.44)
  silkscreen extent -10,40 90,100
SOT-233PM#1 [mm]
  rect 1.016x1.27 smd: 1(-0.001,0.015) 2(2.031,0.015) 3(1.015,2.555)
  silkscreen extent -0.51,1.03 2.29,2.55
SOT-233PM#2 [mm]
  rect 1.016x1.27 smd: 1(0.007,0.006) 2(2.039,0.006) 3(1.023,2.546)
  silkscreen extent -0.5,1.02 2.29,2.55
SOT-235 [mil]
  rect 20x40 smd: 1(-37.66,-0.24)
  oval 20x40 smd: 2(-0.16,-0.24) 3(37.34,-0.24) 4(37.34,110) 5(-37.66,110)
  silkscreen extent -56,23 58,86
SOT-236#1 [mil]
  rect 20x40 smd: 1(-37.66,-0.24)
  oval 20x40 smd: 2(-0.16,-0.24) 3(37.34,-0.24) 4(37.34,110) 5(-0.16,110) 6(-37.66,110)
  silkscreen extent -56,23 58,86
SOT-236#2 [mil]
  rect 20x40 smd: 1(-37.23,-0.46)
  oval 20x40 smd: 2(0.27,-0.47) 3(37.77,-0.47) 4(37.77,109.77) 5(0.27,109.77) 6(-37.23,109.77)
  silkscreen extent -56,23 58,86
SOT-236#3 [mil]
  rect 20x40 smd: 1(-37.39,-0.23)
  oval 20x40 smd: 2(0.11,-0.23) 3(37.61,-0.23) 4(37.61,110.01) 5(0.11,110) 6(-37.39,110)
  silkscreen extent -56,23 58,86
TF_CARD [mm]
  round 1 hole 1: 0(-0.013,0.013) 0(7.987,0.013)
  oval 0.6x2 smd: 1(7.287,11.013) 2(6.187,11.013) 3(5.087,11.013) 4(3.987,11.013) 5(2.887,11.013) 6(1.787,11.013) 7(0.687,11.013) 8(-0.413,11.013) 9(-1.513,11.013)
  rect 1.5x1.5 smd: 10(-3.013,10.013)
  rect 2x3 smd: 10(-3.003,1.013) 10(12.487,1.013)
  rect 2x2 smd: 10(11.987,10.013)
  silkscreen extent -2.51,-5.99 11.99,11.94
TO-220-3 [mm]
  rect 1.524x2.5 hole 1: 1(0,0)
  oval 1.524x2.5 hole 1: 2(2.54,0) 3(5.08,0)
USB-A1 [mm]
  rect 2.5x1.5 hole 1: 1(0.49,0.002)
  oval 2.5x1.3 hole 1: 2(0.49,2.502) 3(0.49,4.502)
  oval 2.5x1.5 hole 1: 4(0.49,7.002)
  rect 3x1 hole 0.5: 5(-2.612,9.522) 6(-2.612,-2.478)
  round 1.5 hole 1.2: ""(-2.612,1.252) ""(-2.612,5.752)
  silkscreen extent -5.01,-2.98 2.26,10.02
XTAL3.2*2.5 [mm]
  rect 1.4x1.2 smd: 1(-1.207,-1.013) 3(1.193,0.987) 4(-1.207,0.987)
  rect 1.3x1.2 smd: 2(1.193,-1.013)
  silkscreen extent -2.08,-1.76 2.03,1.73

## Part data
BQ100: library part Battery, "2.54锂电池插座"
BT1: library part Battery, "直插时钟电池"
C1 C2 C3 C4 C5 C6 C7 C8 C9 C10 C11 C12 C13 C14 C15 C16 C17 C18 C19 C20 C21 C22 C23 C24 C25 C26 C27 C28 C29 C30 C32 C33 C100 C101 C102 C103 C104 C105 C106 C107 C108 C114 C115 C116 C123 C501 C502 C503 C504 C505 C506 C508 C509 C510 C511 C512 C513 C516 C517 C518 C524 C525 C526: library part CAP, "贴片电容"
C31 C119 C120 C121 C122 C124 C500: library part ELECTRO1, "直插电解"
C117 C118 C413: library part ELECTRO1, "贴片钽电容"
C200 C201 C202 C203 C204 C205 C206 C207 C208 C209 C210: library part CAP, "直插安规电容"
C400 C401 C402 C403 C404 C405 C406 C407 C408 C409 C411 C412 C417 C418 C514 C515 C519: library part CAP, "Capacitor"
C410 C507: library part ELECTRO1, "Electrolytic Capacitor"
C520 C521 C522 C523: library part 04-02-01
D1 D500: library part PESD1CAN, "贴片防静电管"
D2 D11 D502: library part ESD4, "贴片ESD管"
D3 D10: library part "D Zener", "贴片二极管"
D4 D5 D100 D101 D105 D204: library part DIODE, "贴片二极管"
D6 D7: library part ESD-USB, "贴片ESD管"
D8 D9: "贴片红极发光二极管"
D102: library part Bridge2, "整流桥"
D104: library part DIODE, "贴片瞬态抑制二极管"
D200: library part PESD1CAN, "贴片CAN总线保护器"
D201 D202 D203 D503 D504: library part "D Zener", "贴片稳压管"
F1 F2 F500: library part "THERMAL FUSE", "贴片自恢复保险丝"
F100: library part "THERMAL FUSE", "直插自恢保险丝"
J1: library part "Header 6", "Header, 6-Pin"
J2: library part "Header 2X2", "3.0直插弯头2X2插座"
J3: library part USB, "竖焊USB-A型座"
J4: library part "Header 3", "Header, 3-Pin"
J200: "5.0直插弯头双排座2X5"
J201: library part "Header 6X2", "Header, 6-Pin, Dual row"
J401: library part LCD12664, "贴片上翻盖PFC座"
J500: library part "Header 2", "GSM天线接口"
J501: library part SIM_Card_Lock, "抽屉式SIM卡座"
J502: library part "Header 2", "GPS天线接口"
J503: "Header, 5-Pin, Dual row"
L1 L2 L3 L4 L5 L6 L7 L200 L201 L500 L501 L502 L503: library part ChiZhu, "贴片磁珠"
L100 L101: library part "Trans Adj", "贴片共模电感"
L102: library part INDUCTOR2, "贴片工字电感"
L504: library part Inductor, "贴片电感"
L505: library part INDUCTOR2, "贴片电感"
LS1: "蜂鸣器"
MK500: "Microphone"
Q1 Q400 Q401 Q402 Q500 Q505: library part MOSFET-P, "贴片P沟MOS管"
Q2 Q3 Q5 Q100 Q101 Q102 Q103 Q200 Q201 Q202 Q203 Q204 Q205 Q206 Q207 Q501 Q502: library part 9013, "贴片三极管"
Q4 Q503 Q504 Q506: library part 9013
Q104: library part MOSFET-P, "P-Channel MOSFET"
Q208: library part 9012, "贴片PNP三极管"
Q209: library part MOSFET-N, "贴片IC,N沟MOS管"
R1 R2 R3 R4 R5 R6 R7 R8 R9 R10 R11 R12 R13 R14 R15 R16 R17 R18 R19 R20 R21 R22 R23 R25 R26 R27 R28 R29 R30 R31 R32 R33 R34 R35 R36 R100 R101 R102 R103 R104 R105 R106 R107 R108 R109 R110 R111 R112 R113 R114 R115 R116 R117 R200 R201 R202 R203 R204 R205 R206 R207 R208 R209 R210 R211 R212 R213 R214 R215 R216 R217 R218 R219 R220 R221 R222 R223 R224 R225 R226 R227 R228 R229 R230 R231 R232 R233 R234 R235 R236 R237 R238 R239 R240 R241 R242 R402 R403 R406 R408 R410 R413 R414 R415 R416 R500 R501 R502 R503 R507 R508 R509 R511 R512 R513 R514 R515 R516 R517 R518 R519 R520 R521 R522 R523 R524: library part Res2, "贴片电阻"
R400 R401 R404 R405 R407 R409 R411 R504 R505 R506 R510: library part Res2, "Resistor"
R412: library part "Res Adj2", "Variable Resistor"
U1: library part MAX3232EEWE, "贴片通讯IC"
U2 U4: library part FM25xx, "贴片IC存储器"
U3: library part LPC236x, "贴处IC处理器"
U5: "TF卡座"
U6: library part CrysVcc, "贴片有源晶振"
U7: library part MAX485, "贴片通讯IC"
U8: library part 4442Card, "IC卡座"
U9: "贴片传感器"
U10: library part CAT803, "贴片复位IC"
U100: library part SPX5205, "贴片电源IC"
U101: "IC 同步降压IC"
U102: library part SE9016, "贴片充电IC"
U103: library part IRF7853, "贴片PMOS管"
U200: library part TJA1050, "贴片IC"
U201: library part LM358, "贴片IC"
U400: "贴片IC"
U401: library part LB1836M
U500: library part SPX5205, "贴片电源LDO"
U501: "贴片GPRS通讯模块"
U503: "定位模块"
U504: "贴片SIM卡"
X1: library part CRYSTAL, "无源晶振"

## Free pads (board coordinates)
  rect 8x8 hole 6: 0(4.339,80.24)
  round 6 hole 3.5: 0(5.75,7.5) 0(5.75,68.51) 0(85.76,68.51) 0(165.75,7.5) 0(165.75,68.51)
  round 1 hole 0.5: 0(19.35,69.27) 0(33.68,55.41) 1(8.12,7.55) 1(8.21,68.5) 1(88.22,68.51) 1(168.13,7.65) 2(3.21,68.5) 2(3.35,7.6) 2(83.22,68.51) 2(163.21,68.51) 2(163.36,7.65) 2(165.75,65.97) 3(5.69,9.92) 3(5.74,70.95) 3(85.75,70.96) 3(85.77,66.06) 3(165.74,70.96) 3(165.77,9.94) 4(5.71,65.99) 4(5.75,5.13) 4(165.81,5.15) 5(3.88,6.04) 5(3.93,66.88) 5(163.83,6.1) 6(7.36,9.2) 6(7.5,70.22) 6(87.51,70.23) 6(167.27,9.37) 7(3.91,70.22) 7(4.19,9.14) 7(83.92,70.23) 7(163.91,70.23) 7(164.03,66.67) 7(164.16,9.37) 7(167.47,70.35) 7(167.59,66.79) 8(7.43,5.86) 8(7.7,66.95) 8(167.61,6.07) 46(131.11,39.52)
  round 0.8 hole 0.5: 0(54.31,40.64) 0(55.77,40.64) 0(56.98,40.64) 0(60.77,40.65) 0(62.41,40.65) 0(69.45,41.92) 0(73,41.54)
  rect 5x5 hole 4: 0(79.4,109.84) 0(165.67,36.89)
  rect 2x3 smd: 0(85.101,90.87) 0(102.101,90.87)
  round 1 smd: 0(149.49,54.854) 1(148.679,49.33) 2(14.283,32.11) 2(162.359,62.66) 3(48.34,30.28) 3(58.93,82.21) 3(150.4,58.41) 4(41.364,50.596) 4(46.06,30.24) 5(41.37,52.73) 5(112.68,3.12) 6(101.33,39.67) 6(118.86,10.11) 7(105.94,18.93) 7(119.94,57.75) 8(106.07,104.97) 8(138.21,32.73) 9(90.93,34.25) 9(106.07,108.08) 10(53.492,30.928) 10(129.24,104.47) 11(109.51,0.86) 12(37.158,61.732) 13(33.91,65.85) 14(141.61,110.64) 14(152.4,86.18) 15(10.33,74.38) 17(124.24,52.99) 29(156.71,21.7) 33(24.02,24.33) 37(107.67,34.2) 38(107.68,32.17) 39(157.1,33.33)
  round 2.5 hole 1: 7(3.05,2.52) 7(10.31,5.56) 8(10.97,9.18)
  round 2 smd: 19(166.2,97.89) 19(168.78,97.96)

## Via types
v1: diameter 0.6, hole 0.4, Top Layer to Bottom Layer, 620 vias
v2: diameter 0.8, hole 0.5, Top Layer to Bottom Layer, 121 vias
v3: diameter 1, hole 0.5, Top Layer to Bottom Layer, 10 vias
v4: diameter 1.27, hole 0.711, Top Layer to Bottom Layer, 2 vias